# Altium PCB Selfie.PcbDoc
Units mil, origin at the board's own origin, x right, y up, seen from the top; angles counter-clockwise.
Board outline 904.97 x 1484.97 mil, 2 copper layers (Top Layer, Bottom Layer); 27 components, 23 nets, 111 pads, 51 vias.
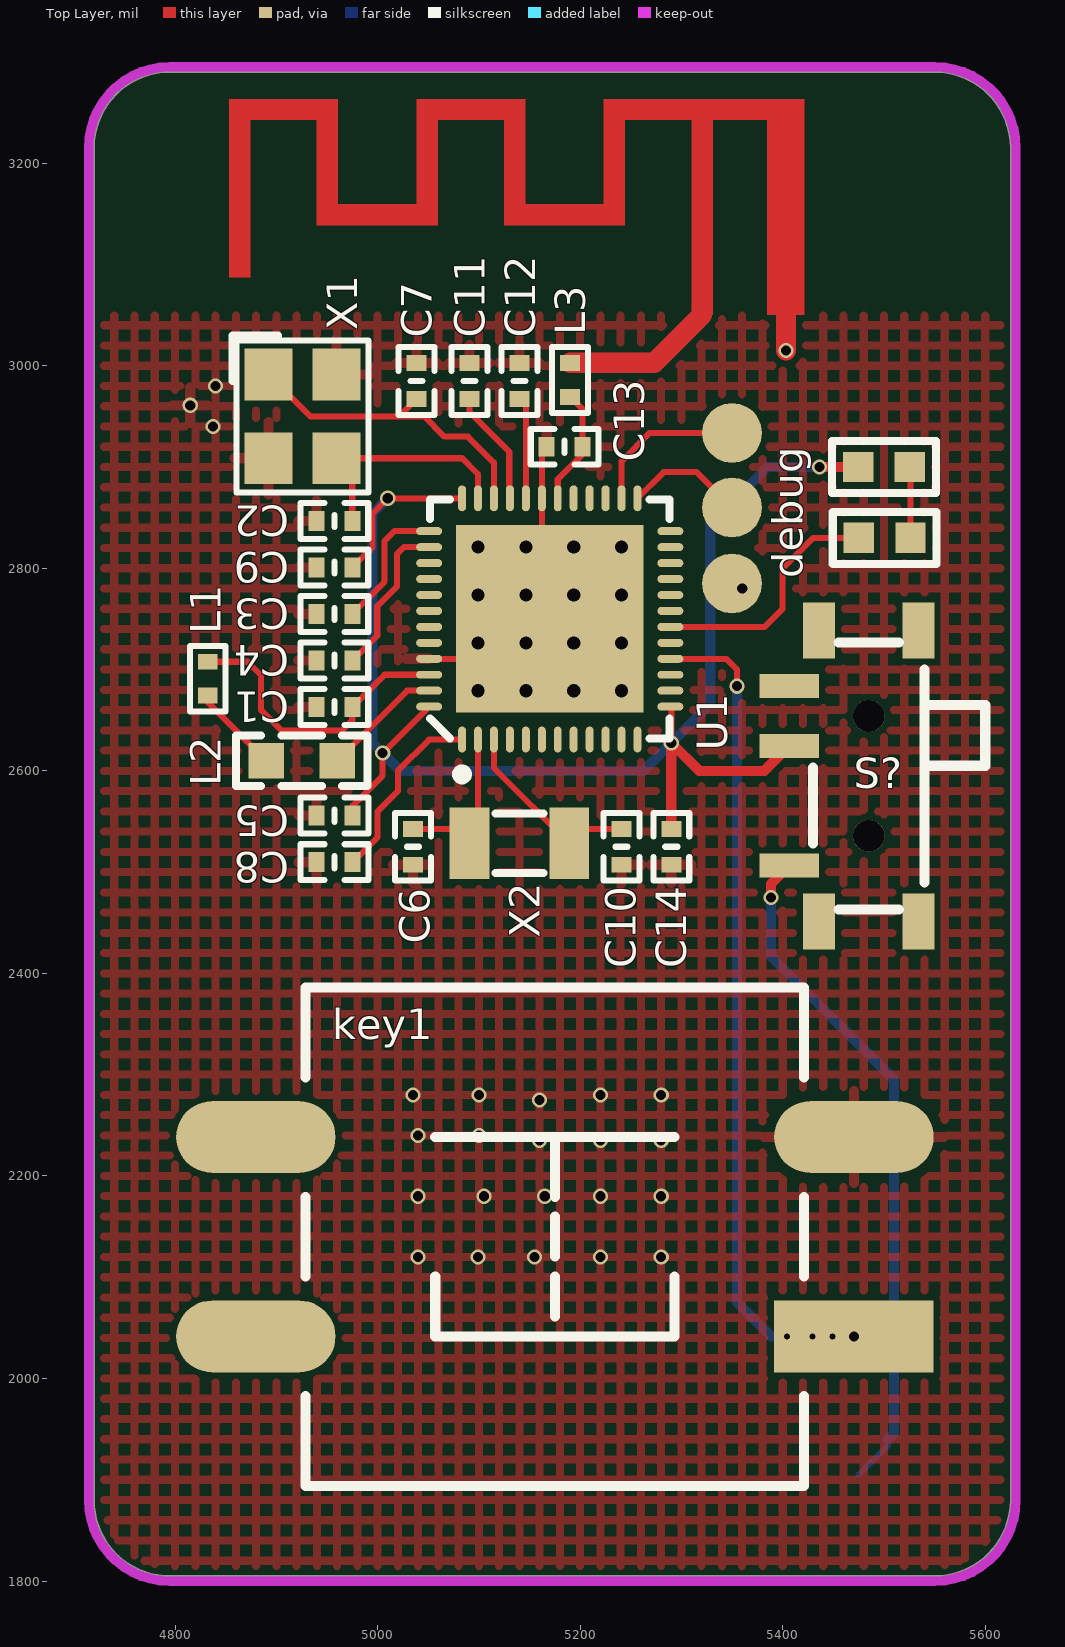
[diagram p0: Top Layer view]
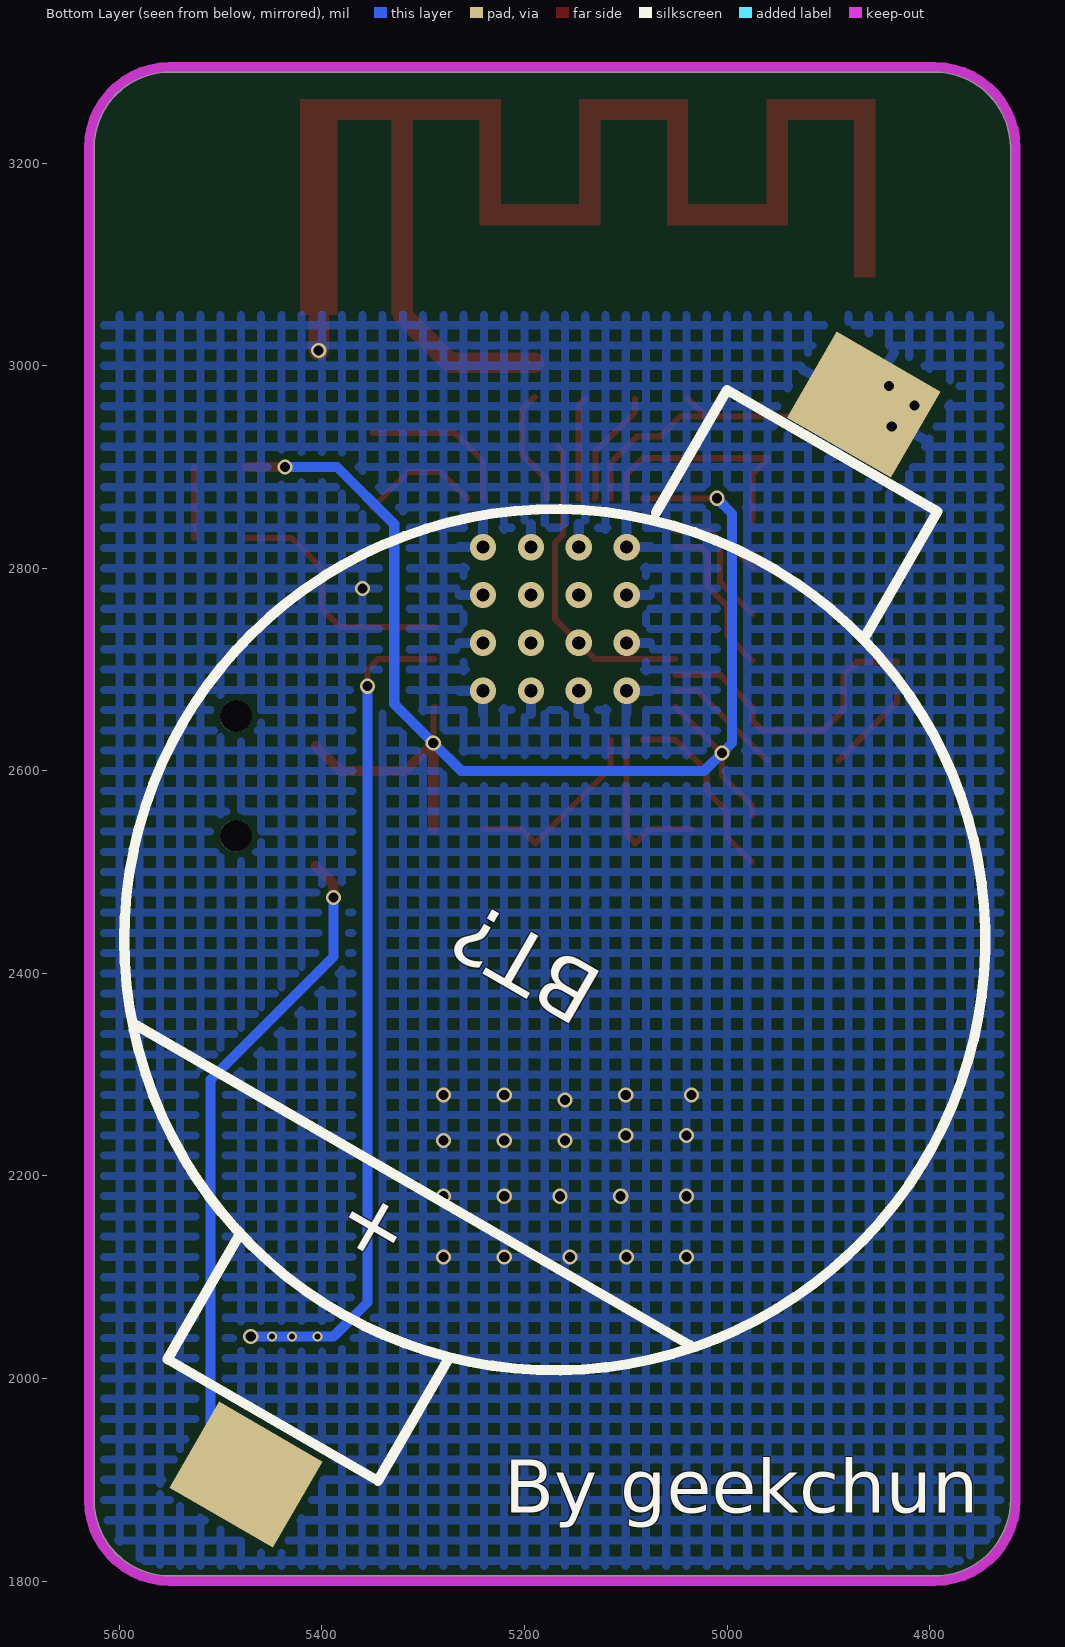
[diagram p1: Bottom Layer view, seen from below]
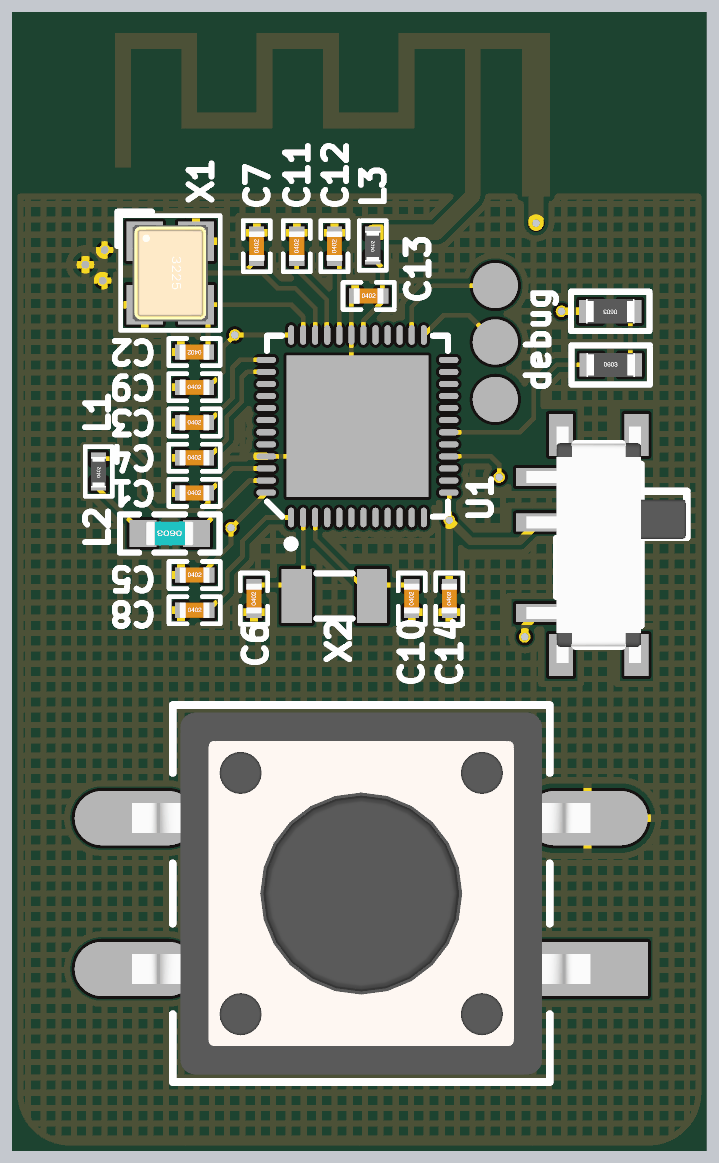
[diagram p2: 3D render of the assembled board from above, using the file's embedded part models]

## Layer stack, top to bottom
Top Solder: solder mask 0.4, Solder Resist, Dk 3.5
Top Layer: signal copper 1.4
Dielectric 1: dielectric 12.6, FR-4, Dk 4.8
Bottom Layer: signal copper 1.4
Bottom Solder: solder mask 0.4, Solder Resist, Dk 3.5

## Board outline
4720.01,1880 ccw(c4715,1880) 4720.01,1880.03 4720.01,3214.92 4720.01,3215 4720.02,3215 cw(c4795,3215) 4794.97,3289.99 cw(c4795,3215) 4795,3289.99 5550,3289.99 5550,3289.98 cw(c5550,3215) 5624.98,3215.03 cw(c5550,3215) 5624.98,3215 cw(c5630,3215) 5624.98,3215.03 5624.98,3215 5624.98,1879.99 ccw(c5550,1880) 5624.98,1880 5624.98,1879.99 cw(c5550,1880) 5550,1805.02 4795.03,1805.01 4795,1805.01 4795,1805.02 cw(c4795,1880)

## Design rules (kind name [scope] priority, off if disabled: settings)
Clearance [All] p1: gap=6 ignorepadtopadclearanceinfootprint=FALSE
ComponentClearance [All] p1 off: gap=10 collisioncheckmode=3 verticalgap=10 showdistances=FALSE
PolygonConnect [All] p1: connectstyle=Relief reliefconductorwidth=10 reliefentries=4 polygonreliefangle="90 Angle" airgapwidth=10
RoutingVias [All] p1: holewidth=6 width=10 viastyle="Through Hole" minholewidth=6 minwidth=10 maxholewidth=28 maxwidth=50
SolderMaskExpansion [All] p1: expansion=4
Width [All] p1: maxlimit=30 minlimit=6 preferedwidth=6 minimp=50.000000 maximp=50.000000 favimp=50.000000
29 further rules are at their usual default settings.

## Components (designator, comment, footprint, x,y, rotation, side; value= is the part's Value field where it differs from the comment)
BT? "电池座" PCBComponent_1 4792.29,2965.76 r30 bottom
C1 "1uF" "C 0402_L" 4957.29,2662.91 r0 top value=1.2pF
C2 "12pF" "C 0402_L" 4957.29,2846.79 r180 top value=1.2pF
C3 "12pF" "C 0402_L" 4957.29,2754.85 r0 top value=1.2pF
C4 "12pF" "C 0402_L" 4957.29,2708.88 r0 top value=1.2pF
C5 "4.7uF" "C 0402_L" 4957.54,2555.75 r0 top value=1.2pF
C6 "12pF" "C 0402_L" 5035,2525 r90 top value=1.2pF
C7 "12pF" "C 0402_L" 5038.51,2985 r90 top value=1.2pF
C8 "100nF" "C 0402_L" 4957.54,2509.78 r0 top value=1.2pF
C9 "100nF" "C 0402_L" 4957.29,2800.82 r0 top value=1.2pF
C10 "12pF" "C 0402_L" 5240.87,2525 r90 top value=1.2pF
C11 "100pF" "C 0402_L" 5090.79,2985 r90 top value=1.2pF
C12 "NC" "C 0402_L" 5140,2985 r90 top value=1.2pF
C13 "0.8pF" "C 0402_L" 5184.67,2920 r0 top value=1.2pF
C14 "100nF" "C 0402_L" 5290,2525 r90 top value=1.2pF
debug "CON3" ISP4 5350,2960 r270 top (schematic designator J1)
key1 "KEY" "TSW SMD-12*12*5" 5175,2140 r180 top
L1 "15nH" "R 0402_L" 4832.29,2690 r90 top value=10礖
L2 "10uH" "L 0603" 4925,2610 r180 top value=10礖
L3 "3.9nH" "R 0402_L" 5190,2985 r90 top value=10礖
S? "开关" MSK-12C01-07 5485,2595 r90 top
U1 "nRF52832-QFAA" QFN40P600X600X90-48N 5170,2750 r90 top
X1 "32MHz" "OSC 3225-4P" 4925.8,2950 r270 top
X2 "32.768kHz" XTAL_3215 5140,2528.49 r180 top
? "Comment" "R 0603_L" 5500.59,2830 r0 top
? "Comment" "R 0603_L" 5500,2900 r180 top
? "Comment" ANT-PCB-2.4G-IFA-AN043-TI-ORIGIN 5320,3060 r0 top

## Footprints (in the part's own frame and the unit in brackets; to place one, negate y for a bottom-side part, rotate by r counter-clockwise, add the part's x,y. Pads: shape width x height; smd on the part's side, far side on the other; paste and mask are expansions set on the pad)
ANT-PCB-2.4G-IFA-AN043-TI-ORIGIN [mil]
  Top Layer region: 101.4,203.36 101.4,-9.84 64.97,-9.84 64.97,182.68 10.85,182.68 10.85,-9.84 -9.84,-9.84 -9.84,182.68 -75.77,182.68 -75.77,78.74 -194.88,78.74 -194.88,182.68 -260.8,182.68 -260.8,78.74 -379.91,78.74 -379.91,78.73 -379.91,78.73 -379.91,182.68 -445.84,182.68 -445.85,182.67 -445.85,182.67 -445.84,182.67 -445.84,27.58 -445.84,27.57 -445.84,27.55 -466.53,27.55 -466.53,28.16 -466.52,28.18 -466.53,28.18 -466.53,203.28 -466.45,203.36 -359.23,203.36 -359.23,99.41 -281.49,99.41 -281.49,203.36 -174.19,203.36 -174.19,99.41 -96.45,99.41 -96.45,203.36
"C 0402_L" [mm] "无极性贴片电容"
  rect 0.4x0.5 smd: 1(-0.45,0) 2(0.45,0)
  silkscreen extent -0.85,-0.45 0.85,0.45, body extent -0.5,-0.26 0.5,0.26, height 0.53
ISP4 [mm] "4P测试点"
  round 1.5 smd: 1(0.67,0) 2(2.54,0) 3(4.445,0)
"L 0603" [mil] "小功率贴片电感"
  rect 35x35 smd: 1(-35,0) 2(35,0)
  silkscreen extent -65,-25 65,25, body extent -31,-16 31,16, height 31
MSK-12C01-07 [mm] "6.7*2.8*1.5mm(长宽高）"
  rect 1.4x0.8 smd: 0(-3.65,-1.25) 0(-3.65,1.25) 0(3.65,-1.25) 0(3.65,1.25)
  rect 0.6x1.5 smd: 1(-2.25,1.996) 2(0.75,1.996) 3(2.25,1.996)
  round 0.8 hole 0.8: " "(-1.5,0) " "(1.5,0)
  silkscreen extent -3.35,-2.92 3.35,1.4, body extent -3.92,-2.9 3.92,2.4, height 1.5
"OSC 3225-4P" [mm] "3.2*2.5*0.7mm(长宽高)"
  rect 1.3x1.2 smd: 1(-1.05,-0.85) 2(1.05,-0.85) 3(1.05,0.85) 4(-1.05,0.85)
  silkscreen extent -2.03,-1.75 1.9,1.65, body extent -1.6,-1.25 1.6,1.25, height 0.7
PCBComponent_1 [mm]
  rect 3x2.5 smd: 1(1.546,32.004) 2(1.546,1.016)
  silkscreen extent -9.25,2.41 12.35,30.48
QFN40P600X600X90-48N [mm] "QFN, 48-Leads, Body 6,0x6,0mm (max), Pitch 0,40mm, IPC Medium Density"
  oval 0.65x0.2 smd: 1(-3.025,2.2) 2(-3.025,1.8) 3(-3.025,1.4) 4(-3.025,1) 5(-3.025,0.6) 6(-3.025,0.2) 7(-3.025,-0.2) 8(-3.025,-0.6) 9(-3.025,-1) 10(-3.025,-1.4) 11(-3.025,-1.8) 12(-3.025,-2.2) 25(3.025,-2.2) 26(3.025,-1.8) 27(3.025,-1.4) 28(3.025,-1) 29(3.025,-0.6) 30(3.025,-0.2) 31(3.025,0.2) 32(3.025,0.6) 33(3.025,1) 34(3.025,1.4) 35(3.025,1.8) 36(3.025,2.2)
  oval 0.2x0.65 smd: 13(-2.2,-3.025) 14(-1.8,-3.025) 15(-1.4,-3.025) 16(-1,-3.025) 17(-0.6,-3.025) 18(-0.2,-3.025) 19(0.2,-3.025) 20(0.6,-3.025) 21(1,-3.025) 22(1.4,-3.025) 23(1.8,-3.025) 24(2.2,-3.025) 37(2.2,3.025) 38(1.8,3.025) 39(1.4,3.025) 40(1,3.025) 41(0.6,3.025) 42(0.2,3.025) 43(-0.2,3.025) 44(-0.6,3.025) 45(-1,3.025) 46(-1.4,3.025) 47(-1.8,3.025) 48(-2.2,3.025)
  rect 4.7x4.7 smd: 49(0,0)
  silkscreen extent -4.02,-3 3,3, body extent -3.02,-3.02 3.02,3.02, height 0.86
"R 0402_L" [mm] "1/16W贴片电阻"
  rect 0.4x0.5 smd: 1(-0.4,0) 2(0.45,0)
  silkscreen extent -0.8,-0.45 0.85,0.45, body extent -0.5,-0.25 0.5,0.25, height 0.3
"R 0603_L" [mil] "1/10W贴片电阻"
  rect 30x30 smd: 1(-25.59,0) 2(25.59,0)
  silkscreen extent -51,-26 51,26, body extent -31,-16 32,16, height 16
"TSW SMD-12*12*5" [mm] "12*12*5mm"
  rect 4x1.8 smd: 1(-7.5,2.5)
  oval 4x1.8 smd: 2(-7.5,-2.5) 3(7.5,-2.5) 4(7.5,2.5)
  silkscreen extent -6.25,-6.25 6.25,6.25, body extent -7.6,-6 7.6,6, height 5.15
XTAL_3215 [mm] "XTAL SMD 3.2 x 1.5 mm"
  rect 1x1.8 smd: 1(-1.25,0) 2(1.25,0)
  silkscreen extent -0.6,-0.75 0.6,0.75, body extent -1.6,-0.75 1.6,0.75, height 0.81

## Part data
BT?: library part 干电池, "Battery"
C1 C2 C3 C4 C5 C6 C7 C8 C9 C10 C11 C12 C13 C14: "Capacitor, NP0, ?.1pF", Part Number=C0402-1.2p, Artikkelnr Noca=20029157, Artikkelnr Simpro=N.A., Footprint Doc=0402, LatestRevisionDate=2011-05-11, Note=50V, Pin Count=2, Published=2009-05-08, Publisher="Nordic Semiconductor"
L1 L2 L3: "Inductor, 80mA, ?0%", 2nd source part number=178-6105, Manufacturer="Taiyo Yuden", Manufacturer Part Number=LBMF1608T100K, Part Number=L0603-10?, Supplier part number=587-1714-1-ND, 2nd source Supplier=Farnell, Artikkelnr Noca=33029314, Artikkelnr Simpro=N.A., Datasheet=http://www.yuden.co.jp/ut/product/pdf/elb2_e.pdf, Footprint Doc=0603, LatestRevisionDate=2012-09-19, Note="LBMF1608T100K 10礖 80mA 0603", Pin Count=2, Published=2010-02-24, Publisher="Nordic Semiconductor", Supplier=Digi-Key
S?: library part 单刀开关
U1: "Multi-protocol Bluetooth Low Energy and 2.4GHz proprietary system-on-chip", Manufacturer="Nordic Semiconductor", Artikkelnr Noca=N.A., Artikkelnr Simpro=N.A., Footprint Doc=QFN-48, LatestRevisionDate=2014-11-26, Manufacturer Part Number=nRF52832-QFAA, Part Number=nRF52832-QFAA, Pin Count=48, Published=2014-11-26, Publisher="Nordic Semiconductor", Supplier="Nordic Semiconductor"
X1: "XTAL SMD 2016, 32MHz, Cl=8pF, Tol: ?0ppm, Stab: ?0ppm", Manufacturer="Epson Toyocom", Manufacturer Part Number=Q22FA12800025, Part Number=XTAL_SMD2016_32MHz_8pF_Epson, Supplier part number=171-2806, Artikkelnr Noca=N.A., Artikkelnr Simpro=N.A., Datasheet=http://www.epsondevice.com/docs/qd/en/DownloadServlet?id=ID000449, Footprint Doc=XTAL_2016, LatestRevisionDate=2014-11-27, Note="XTAL SMD 32.000MHz", Pin Count=4, Published=2012-03-09, Publisher="Nordic Semiconductor", Supplier=Farnell
X2: "EPSON TOYOCOM - FC-135 32.768KHZ ?0PPM,9.0PF - CRYSTAL, SM, WATCH", 2nd source part number=127-8037, Manufacturer="Epson Toyocom", Manufacturer Part Number="FC-135 32.768KHZ ?0PPM,9.0PF", Part Number="XTAL_FC-135 32.768k", Supplier part number="FC-135 32.7680KA-AC-ND", 2nd source Supplier=Farnell, Artikkelnr Noca=22019091, Artikkelnr Simpro=N.A., Datasheet=http://www.farnell.com/datasheets/57480.pdf, Footprint Doc=XTAL_3215, LatestRevisionDate=2014-03-27, Note="XTAL SMD 32.768kHz, 3215", Pin Count=2, Published=2010-10-18, Publisher="Nordic Semiconductor", Supplier=Digi-Key

## Via types
v1: diameter 15, hole 10, Top Layer to Bottom Layer, 32 vias
v2: diameter 25.98, hole 12.99, Top Layer to Bottom Layer, 16 vias
v3: diameter 10, hole 6, Top Layer to Bottom Layer, 3 vias

## Nets (pads, with @x,y where several pads share a name; then routed paths per layer and width w, separated by ;. In a path a pad name is that pad's centre, name@x,y a point inside that pad or via, vN(x,y) a via of type N, cw(c..) or ccw(c..) an arc to the next point about the centre after c; other vN are vias at no path point)
GND: BT?.2 C1.1 C2.2 C3.1 C4.1 C5.1 C6.1 C7.2 C8.1 C9.1 C10.1 C11.2 C12.2 C13.1 C14.1 debug.3 key1.2 U1.31 U1.45 U1.49 X1.2 X1.4 | length 310.7
  Top Layer w6: U1.45 5130.63,2710.63 v2(5146.38,2726.38) U1.49 5170,2825 5162.13,2832.87 U1.31 5162.13,2915.17 C13.1
  other v1: 5040,2120 5099.13,2120 5155,2120 5220,2120 5280,2120 5040,2180 5105,2180 5165,2180 5220,2180 5280,2180 5160,2235 5220,2235 5280,2235 5040,2240 5100,2240 5160,2275 5035,2280 5100,2280 5220,2280 5280,2280 5360,2780 4837.36,2940 4815,2960.91 4840,2980 5403.18,3015
  other v2: 5099.13,2679.13 5146.38,2679.13 5193.62,2679.13 5240.87,2679.13 5099.13,2726.38 5193.62,2726.38 5240.87,2726.38 5099.13,2773.62 5146.38,2773.62 5193.62,2773.62 5240.87,2773.62 5099.13,2820.87 5146.38,2820.87 5193.62,2820.87 5240.87,2820.87
led+: 
led-: ?.1@5475,2830 U1.18 | length 245.7
  Top Layer w6: U1.18 5382.13,2742.13 5400,2760 5400,2800 5430,2830 ?.1@5475,2830
NetBT?_1: BT?.1 S?.1 | length 673.7
  Top Layer w10: v1(5388.43,2475) 5388.43,2488.43 S?.1
  Bottom Layer w6: BT?.1 5503.79,1933.79 BT?.1@5503.79,1940
  Bottom Layer w10: v1(5388.43,2475) 5388.43,2416.57 5510,2295 5510,1946.21 BT?.1@5503.79,1940
NetC1_2: C1.2 L1.2 U1.46 | length 297
  Top Layer w6: L1.2 4871.44,2707.72 4885,2694.15 4885,2660 4905,2640 4965,2640 4975,2650 C1.2 5006.97,2694.88 U1.46
NetC2_1: C2.1 U1.35 X1.3 | length 238.6
  Top Layer w6: C2.1 4975,2892.92 X1.3 5083.39,2908.66 5099.13,2892.91 U1.35
NetC3_2: C3.2 U1.37 | length 133.3
  Top Layer w6: C3.2 5007,2786.85 5007,2827 5016.61,2836.61 U1.37
NetC4_2: C4.2 U1.38 | length 158.1
  Top Layer w6: C4.2 4999.64,2733.52 4999.64,2762.52 5019,2781.88 5019,2814 5025.87,2820.87 U1.38
NetC6_2: C6.2 U1.2 X2.2 | length 167.5
  Top Layer w6: C6.2 5076.57,2542.71 X2.2 5099.13,2536.84 U1.2
NetC7_1: C7.1 U1.34 X1.1 | length 318.2
  Top Layer w6: X1.1 4933.67,2950 5021.23,2950 ; C7.1 5021.23,2950 ; U1.34 5114.88,2904.25 5089.13,2930 5065.91,2930 5045.91,2950 5021.23,2950
NetC8_2: C8.2 U1.1 | length 184.9
  Top Layer w6: C8.2 5000,2534.52 5000,2560 5020,2580 5020,2600 5050.91,2630.91 U1.1
NetC10_2: C10.2 U1.3 X2.1 | length 190.8
  Top Layer w6: U1.3 5114.88,2602.82 X2.1 5203.43,2542.71 C10.2
NetC11_1: C11.1 U1.33 | length 114.7
  Top Layer w6: C11.1 5090.79,2954.21 5130,2915 5130,2869.72 U1.33
NetC12_1: C12.1 U1.32 | length 100.8
  Top Layer w6: C12.1 5146.38,2960.91 U1.32
NetC13_2: C13.2 L3.1 U1.30 | length 115.4
  Top Layer w6: U1.30 5177.87,2887.87 5202.39,2912.39 C13.2 5202.39,2956.86 L3.1
NetJ1_1: debug.1 U1.26 | length 157.4
  Top Layer w6: U1.26 5240.87,2905.87 5268.62,2933.62 debug.1
NetJ1_2: debug.2 U1.25 | length 118.6
  Top Layer w6: U1.25 5282.52,2895 5315,2895 debug.2
Netkey1_1: key1.1 U1.16 | length 824.4
  Top Layer w6: U1.16 5344.37,2710.63 5355,2700 v1(5355,2683.58)
  Bottom Layer w10: v1(5355,2683.58) 5355,2075 5388.43,2041.57 v1(5470.28,2041.57)
  other v3: 5404.35,2041.57 5429.35,2041.57 5449.35,2041.57
NetL1_1: L1.1 L2.2 | length 88.2
  Top Layer w6: L1.1 4832.29,2667.71 L2.2
NetL2_1: L2.1 U1.47 | length 119.5
  Top Layer w6: L2.1 5029.13,2679.13 U1.47
r_led+: 
r_led-: ?.1@5525.59,2900 ?.2@5526.18,2830 | length 70.2
  Top Layer w6: ?.1@5525.59,2900 5526.18,2899.42 ?.2@5526.18,2830
VCC: ?.2@5474.41,2900 C5.2 C9.2 C14.2 S?.2 U1.13 U1.36 U1.48 | length 1521
  Top Layer w6: C9.2 4995,2820.82 4995,2854.09 v1(5010,2869.09) U1.36 ; C5.2 4975.25,2565.61 5005,2595.36 v1(5005,2617.48) U1.48 ; U1.13 5290,2662.48 v1(5290,2627.48)
  Top Layer w10: C14.2 v1(5290,2627.48) 5317.48,2600 5381.89,2600 S?.2 ; v1(5436.38,2900) ?.2@5474.41,2900
  Bottom Layer w10: v1(5010,2869.09) 4995,2854.09 4995,2627.48 v1(5005,2617.48) 5022.48,2600 5262.52,2600 v1(5290,2627.48) 5328.5,2665.98 5328.5,2843.5 5385,2900 v1(5436.38,2900)
pads on no net: "S?. " key1.3 key1.4 L3.2 S?.0 S?.3 U1.4 U1.5 U1.6 U1.7 U1.8 U1.9 U1.10 U1.11 U1.12 U1.14 U1.15 U1.17 U1.19 U1.20 U1.21 U1.22 U1.23 U1.24 U1.27 U1.28 U1.29 U1.39 U1.40 U1.41 U1.42 U1.43 U1.44
copper on no net: | length 229.8
  Top Layer w10: 5320,3049.65 5320,3075
  Top Layer w20: 5190,3003.06 5273.06,3003.06 5320,3050 ; 5403.18,3015 5403.18,3070

## Polygon pours and split planes (outlines as drawn)
GND on Bottom Layer (hatched 90Degree grid 20 track 8, remove dead copper, pour order 20): 4695,3050 5670,3050 5670,1485 5550,1605 4650,1605 4650,3010 4685,3045
no net on Bottom Layer "Bottom Layer-No Net" (solid, pour order 4): 4640,3030
GND on Top Layer (hatched 90Degree grid 20 track 8, remove dead copper, pour order 16): 4610,3050.16 4610.5,3049.65 5740,3049.65 5740,1660 5655,1575 5585,1645 4625,1645 4625,3025 4610,3040

## Keep-outs
Top Layer:
  lines w10: 4715,1880 ccw(c4795,1880) 4795,1800 5550,1800 ; 4715,1880 4715,1880 ; 4715,1880 4715,3215 cw(c4795,3215) 4795,3295 5550,3295 cw(c5550,3215) 5630,3215 ; 5550,1800 ccw(c5550,1880) 5630,1880 5630,3215 ; 5550,1800 5550,1800 ; 5630,3215 5630,3215
Bottom Layer:
  lines w10: 5630,3215 ccw(c5550,3215) 5550,3295 4795,3295 ccw(c4795,3215) 4715,3215 4715,1880 ccw(c4795,1880) 4795,1800 5550,1800 ccw(c5550,1880) 5630,1880 5630,3215 ; 5630,3215 5630,3215

## Silkscreen, mask and mechanical layers (free items; w line width, h text height)
Bottom Overlay:
  text "By geekchun" at 5220,1850 h90
Mechanical 1:
  lines w10: 5630,1870 5630,3215 ccw(c5550,3215) 5550,3295 4795,3295 ccw(c4795,3215) 4715,3215 4715,1880 ccw(c4795,1880) 4795,1800 5550,1800 ccw(c5550,1880) 5630,1880

## Text inside footprints (layer, text, board x,y; h text height)
BT?: Bottom Overlay "+" at 5306.94,2154.38 h60 r210